# Altium PCB IK-1.PCBDOC (part 1 of 2)
Units mil, origin at the board's own origin, x right, y up, seen from the top; angles counter-clockwise.
Board outline 1760 x 825 mil, 4 copper layers (Top, GND Plane, Mid1-Ver, Bottom), stack 61.6 mil thick; 31 components, 39 nets, 162 pads, 193 vias.
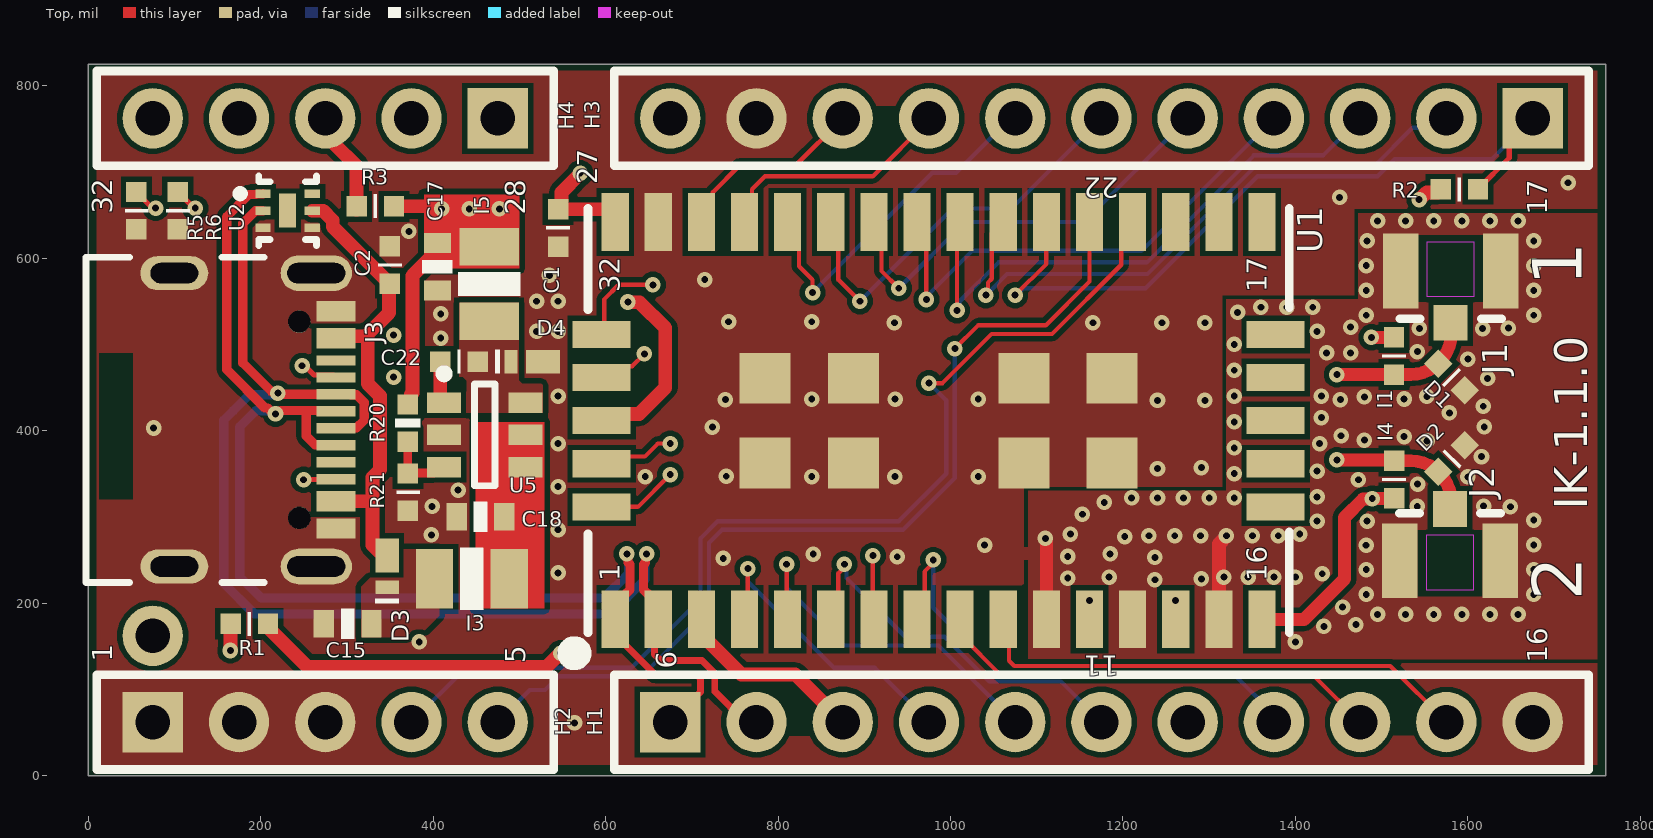
[diagram p0: Top view]
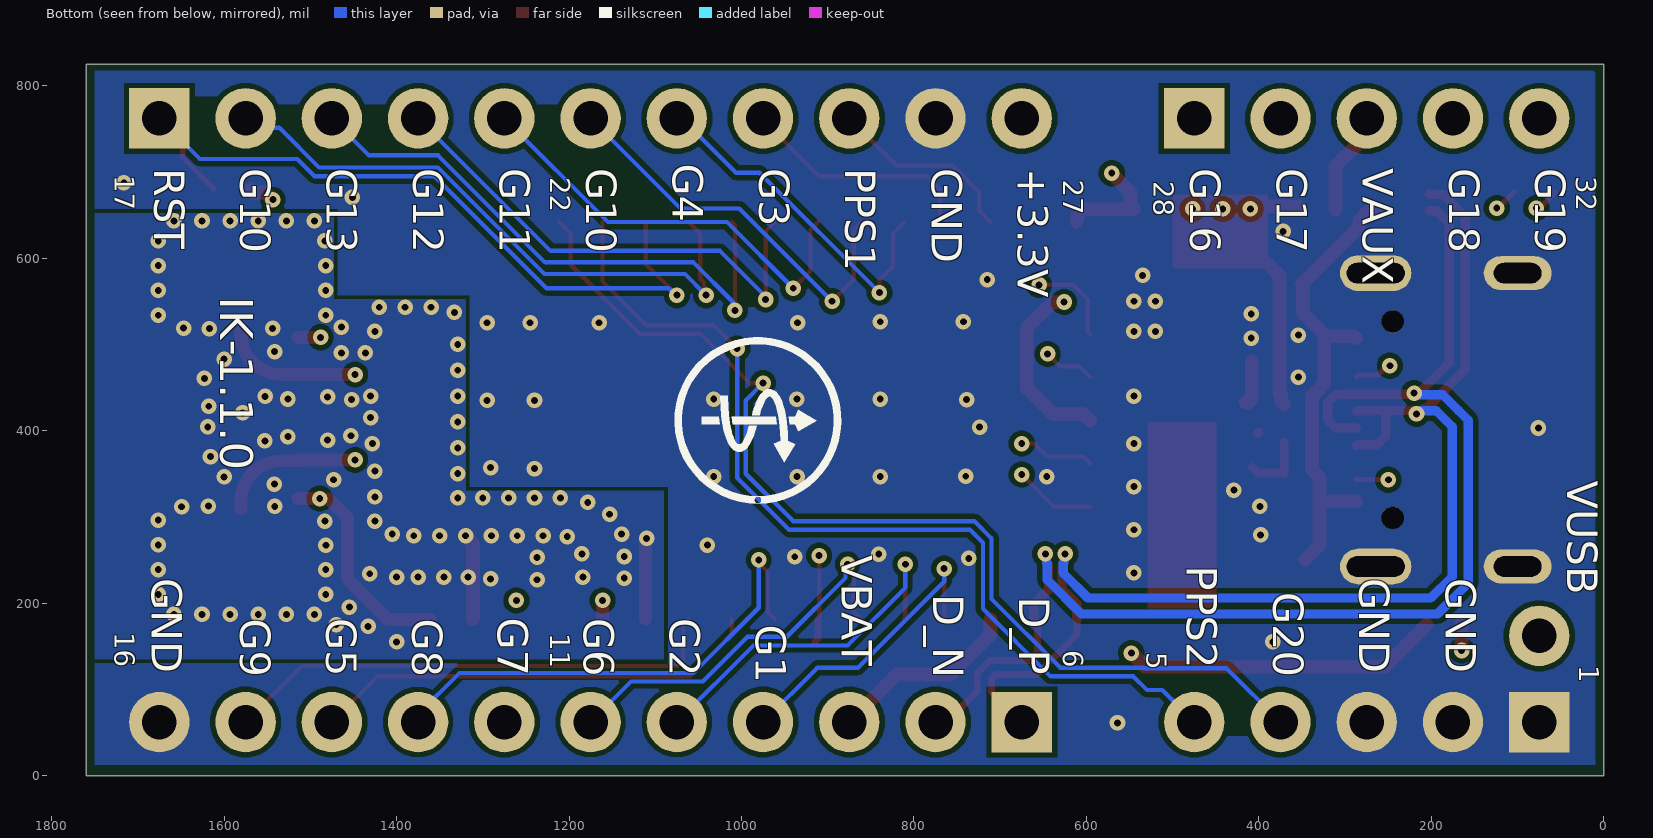
[diagram p1: Bottom view, seen from below]
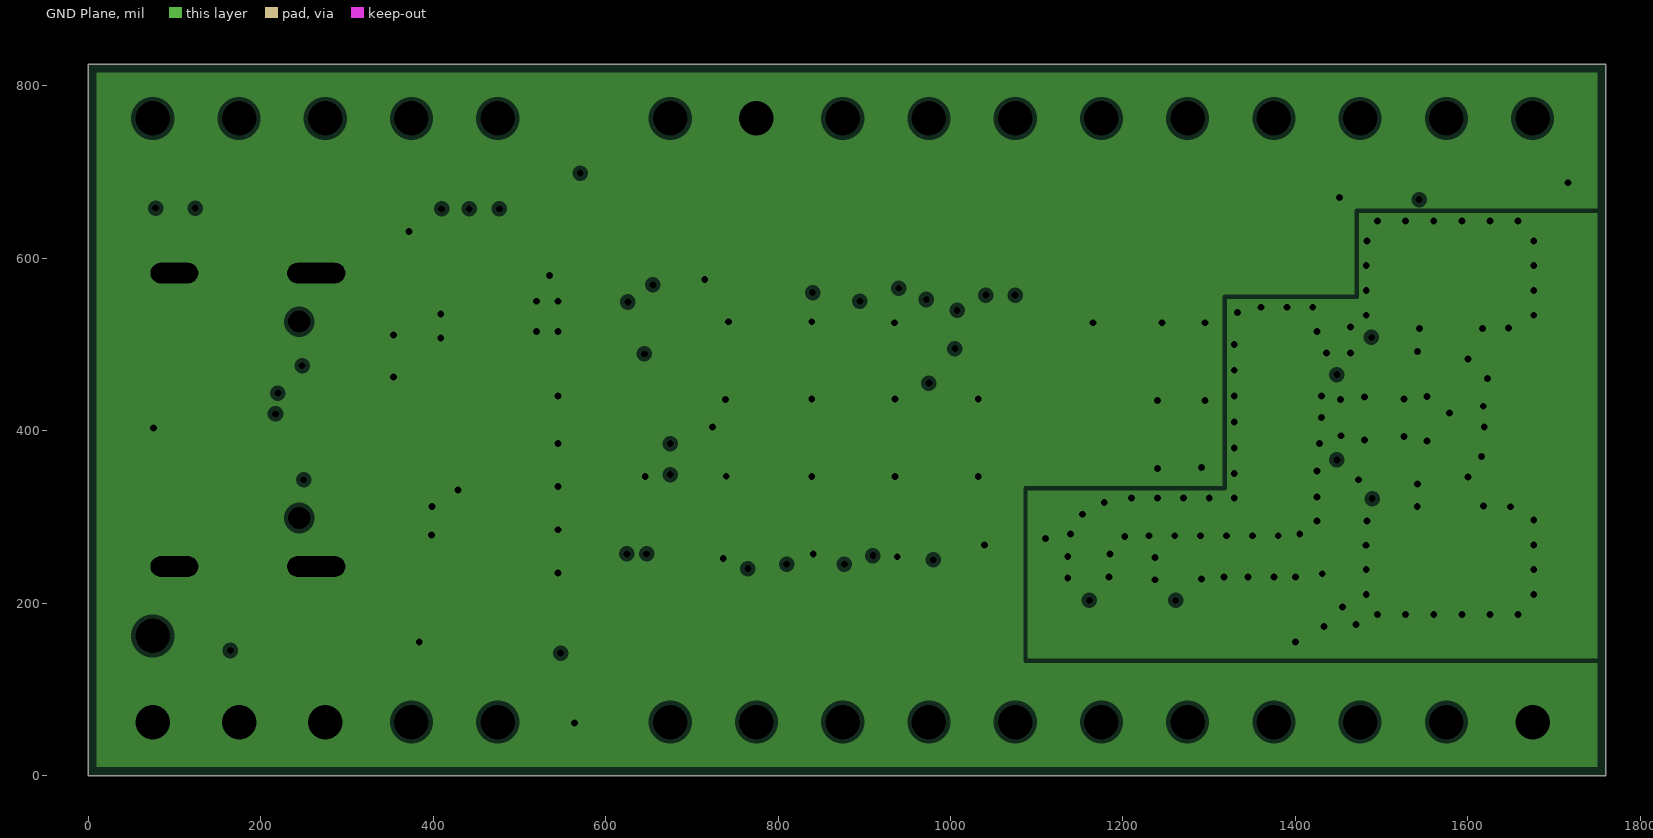
[diagram p2: GND Plane, clearances drawn from the general rule]
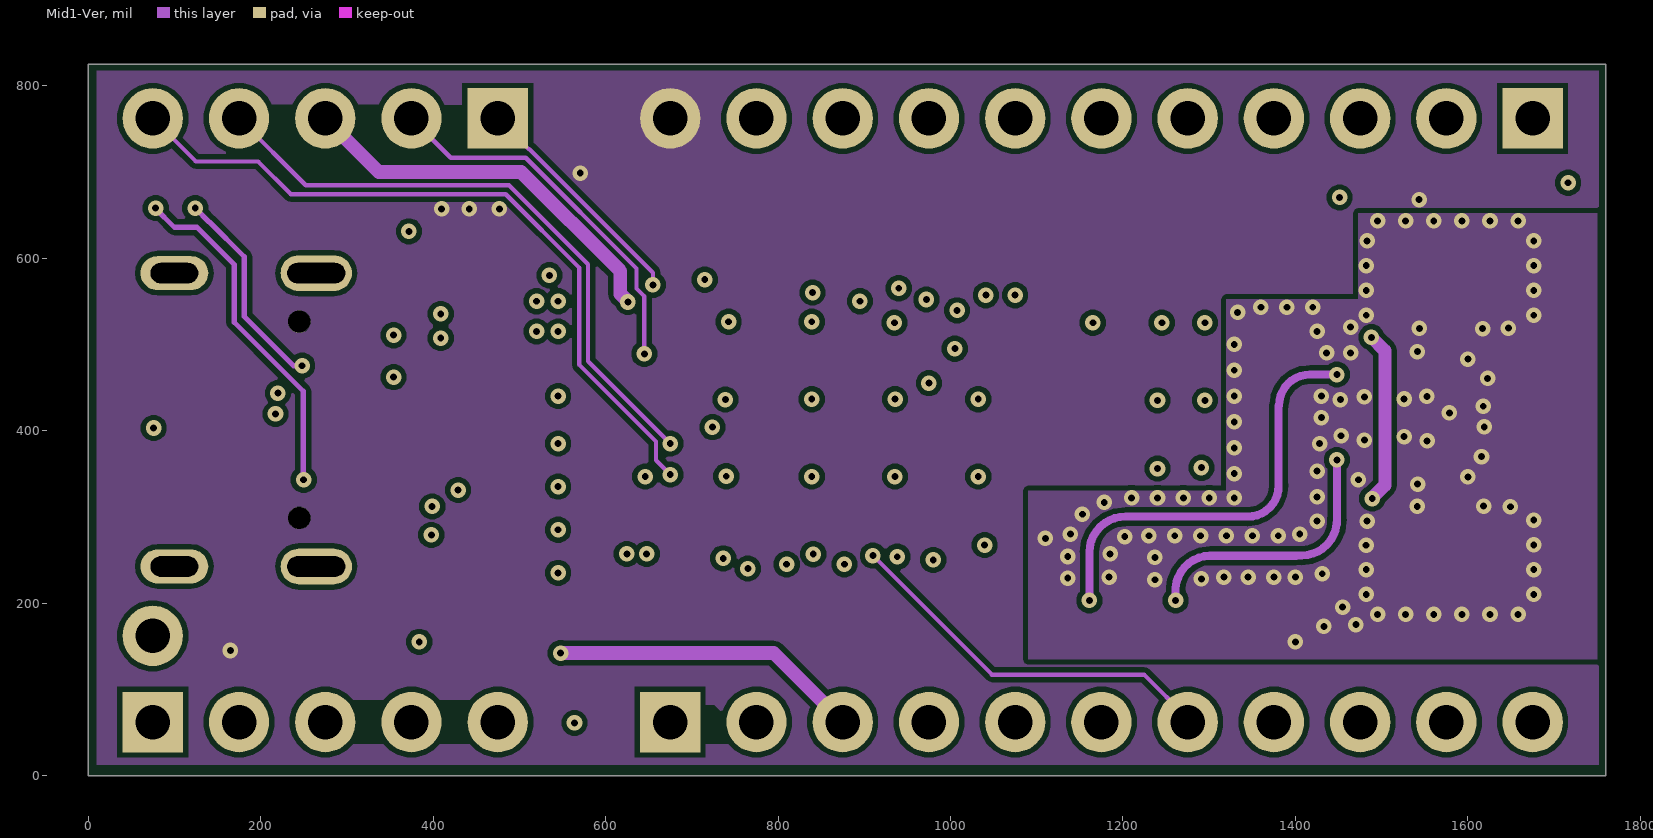
[diagram p3: Mid1-Ver]
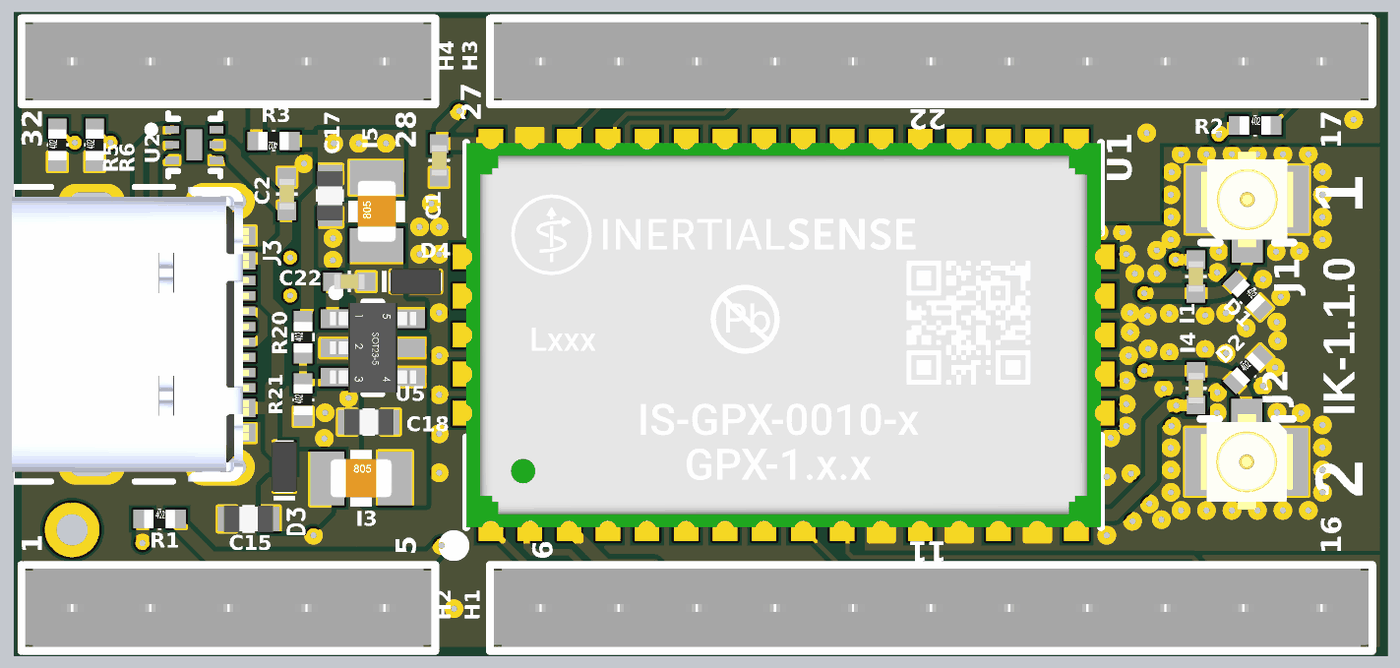
[diagram p4: 3D render of the assembled board from above, using the file's embedded part models]

## Layer stack, top to bottom
Solder Mask Top: solder mask 0.4, Solder Resist, Dk 3.5
Top: signal copper 2.1
Dielectric1: prepreg 8, PP-006, Dk 4.1
GND Plane: plane copper 0.7, net GND
Dielectric3: core 40, Core-009, Dk 4.5
Mid1-Ver: signal copper 0.7
Dielectric2: prepreg 8, PP-006, Dk 4.1
Bottom: signal copper 2.1
Solder Mask Bottom: solder mask 0.4, Solder Resist, Dk 3.5

## Board outline
1760,0 0,0 0,825 1760,825

## Design rules (kind name [scope] priority, off if disabled: settings)
AssemblyTestPointUsage [All] p1 off:
AssemblyTestpoint [All] p1 off: testpointundercomponent=TRUE minsize=40 maxsize=100 preferedsize=60 minholesize=0 maxholesize=40 preferedholesize=32 testpointgrid=1 usegrid=TRUE gridtolerance=0.01 allowsidetop=TRUE allowsidebottom=TRUE
BoardOutlineClearance BoardOutlineClearance_1 [OnLayer('Silkscreen Top')] p1: gap=0 ignorepadtopadclearanceinfootprint=FALSE
BoardOutlineClearance [All] p2 off: gap=9.84 ignorepadtopadclearanceinfootprint=FALSE
Clearance "Stitching GND" [IsStitchingVia and InNet('GND') vs (IsVia and (Not IsStitchingVia)) Or IsPad] p1: gap=1.97 ignorepadtopadclearanceinfootprint=FALSE
Clearance "Clearance - GPS Ant" [All vs InNet('GPS1_ANT')] p2: gap=8 ignorepadtopadclearanceinfootprint=FALSE except(0: Arc-Hole Track-Hole SMDPad-Hole THPad-Hole Via-Hole Fill-Hole Poly-Hole Region-Hole Text-Hole)
Clearance [All] p3: gap=5 ignorepadtopadclearanceinfootprint=FALSE except(0: Arc-Hole Track-Hole SMDPad-Hole THPad-Hole Via-Hole Fill-Hole Poly-Hole Region-Hole Text-Hole; 5.91: Arc-Fill Arc-Poly Arc-Region Track-Fill Track-Poly Track-Region SMDPad-Fill SMDPad-Poly SMDPad-Region THPad-Fill THPad-Poly THPad-Region Via-Fill Via-Poly Via-Region Fill-Fill Fill-Poly Fill-Region Poly-Poly Poly-Region Region-Region)
ComponentClearance Ignore [InComponent('H7')] p1: gap=-500 collisioncheckmode=3 verticalgap=-500 showdistances=FALSE
ComponentClearance HeaderClearance [InComponent('H1')] p2: gap=10 collisioncheckmode=3 verticalgap=-10 showdistances=FALSE
ComponentClearance Default [All] p3: gap=10 collisioncheckmode=3 verticalgap=10 showdistances=FALSE
DiffPairsRouting USB [InDifferentialPairClass('USB')] p1: maxlimit=5 minlimit=5 mostfreqgap=5 toplayer_minwidth=10.7 toplayer_maxwidth=10.8 toplayer_prefwidth=10.73 midlayer1_minwidth=6.9 midlayer1_maxwidth=7 midlayer1_prefwidth=6.97 bottomlayer_minwidth=10.7 bottomlayer_maxwidth=10.8 bottomlayer_prefwidth=10.73 impedanceprofiledriven=TRUE impedanceprofileid={BBA8E3E2-537E-421E-AE39-E3884618F825} impedanceprofilevalue=90.000000 maxuncoupledlength=500
DiffPairsRouting [All] p2: maxlimit=8 minlimit=8 mostfreqgap=8 toplayer_minwidth=8 toplayer_maxwidth=15 toplayer_prefwidth=15 midlayer1_minwidth=8 midlayer1_maxwidth=15 midlayer1_prefwidth=15 bottomlayer_minwidth=8 bottomlayer_maxwidth=15 bottomlayer_prefwidth=15 maxuncoupledlength=500
FabricationTestPointUsage [All] p1 off: valid=0 allowmultiple=FALSE
FabricationTestpoint [All] p1 off: side=3 testpointundercomponent=TRUE minsize=40 maxsize=100 preferedsize=60 minholesize=0 maxholesize=40 preferedholesize=32 testpointgrid=1 allowsidetop=TRUE allowsidebottom=TRUE usegrid=TRUE gridtolerance=0.01
HoleSize [All] p1: absolutevalues=TRUE maxlimit=200 minlimit=8 maxpercent=80.000 minpercent=20.000
HoleToHoleClearance [All] p1: gap=9 allowstackedmicrovias=TRUE
MinimumAnnularRing [All] p1: minimumring=4.5
MinimumSolderMaskSliver [All] p1: minsoldermaskwidth=3
PlaneClearance [All] p1: clearance=5
PlaneConnect "Power Plane Connect Style" [All] p1: planeconnectstyle=Direct reliefexpansion=20 reliefentries=4 reliefconductorwidth=7 reliefairgap=10
PolygonConnect "No Thermal Polygon Connect" [All vs InNamedPolygon('+1.8_L-01_P-002') or InNamedPolygon('GND_L01_P044') or InPolygonClass('NO THERMALS')] p1: connectstyle=Direct reliefconductorwidth=10 reliefentries=4 polygonreliefangle="90 Angle" airgapwidth=10
PolygonConnect "Default Polygon Connect" [All] p2: thpad.connectstyle=Relief thpad.reliefconductorwidth=5.91 thpad.reliefentries=4 thpad.polygonreliefangle="90 Angle" thpad.airgapwidth=5.91 smdpad.connectstyle=Relief smdpad.reliefconductorwidth=5.91 smdpad.reliefentries=4 smdpad.polygonreliefangle="90 Angle" smdpad.airgapwidth=5.91 via.connectstyle=Direct via.reliefconductorwidth=10 via.reliefentries=4 via.polygonreliefangle="90 Angle" via.airgapwidth=10
RoutingCorners "Routing Corners Default" [All] p1: cornerstyle=45-Degree minsetback=100 maxsetback=100
RoutingLayers "Routing Layers Default" [All] p1: top layer_v5=TRUE mid layer 1_v5=TRUE bottom layer_v5=TRUE
RoutingPriority "Routing Priority Default" [All] p1: routingpriority=0
RoutingVias "Via Style Default" [All] p1: holewidth=8 width=18 viastyle="Through Hole" minholewidth=8 minwidth=18 maxholewidth=8 maxwidth=18
SilkToBoardRegionClearance [All] p1 off:
SilkToSilkClearance [Not ( ((ObjectKind = 'Text') And ((UseInvertedRectangle = 'True') OR (IsTextInverted = 'True'))) OR (ObjectKind = 'Fill') ) vs Not ( ((ObjectKind = 'Text') And ((UseInvertedRectangle = 'True') OR (IsTextInverted = 'True'))) OR (ObjectKind = 'Fill') )] p1: silktosilkclearance=0.98
SilkToSolderMaskClearance SilkscreenOverComponentPads [NOT(IsPad AND OnLayer('Multi-Layer'))] p1: minsilkscreentomaskgap=0 clearancetoexposedcopper=TRUE
SolderMaskExpansion SolderMaskExpansion_Via [IsVia] p1: expansion=-19.68 istentingtop=FALSE
SolderMaskExpansion "Solder Mask Expansion" [All] p2: expansion=3 istentingtop=FALSE
SupplyNets "Schematic Supply Nets_5" [InNet('VBUS_IMX')] p1: voltage=0.000
SupplyNets "Schematic Supply Nets_4" [InNet('VIN')] p2: voltage=0.000
SupplyNets "Schematic Supply Nets_3" [InNet('GND')] p3: voltage=0.000
SupplyNets "Schematic Supply Nets_2" [InNet('VBAT')] p4: voltage=0.000
SupplyNets "Schematic Supply Nets_1" [InNet('VAUX')] p5: voltage=0.000
SupplyNets "Schematic Supply Nets" [InNet('+3.3V')] p6: voltage=0.000
Width "RF GPS" [InNetClass('RF_GPS')] p1: maxlimit=14.96 minlimit=9.45 preferedwidth=14.88 toplayer_minwidth=14.88 midlayer1_maxwidth=9.45 midlayer1_prefwidth=9.45 bottomlayer_minwidth=14.88 minimp=50.000000 maximp=50.000000 favimp=50.000000
Width "Width Default" [All] p2: maxlimit=150 minlimit=3 preferedwidth=6
13 further rules are at their usual default settings.

## Classes and differential pairs
net class IMX_USB: USB.D_N USB.D_P
net class RF_GPS: GNSS1_ANT GNSS2_ANT
polygon class "NO THERMALS": +3.3V_L03_P016 GND_L01_P021 GND_L04_P019 RF_GND_L-01_P-001 RF_GND_L-03_P-001 SW_L01_P012 VIN_L01_P017
differential pair USB.D: +USB.D_P -USB.D_N

## Components (designator, comment, footprint, x,y, rotation, side; value= is the part's Value field where it differs from the comment)
C1 "Cap" 0402 545,635 r270 top value=0.1uF
C2 "Cap" 0402 350,592 r90 top value=100nF
C15 "Cap" 0603 301,176 r180 top value=2.2uF
C17 "Cap" 0603 405,590 r270 top value=22uF
C18 "Cap" 0603 455,300 r180 top value=2.2uF
C22 "Cap" 0402 430,480 r0 top value=0.1uF
D1 "Diode - Bidirectional Zener" R0402 1581.06,462 r315 top
D2 "Diode - Bidirectional Zener" R0402 1581.06,367.56 r45 top
D3 "Diode - Schottky" D0603B 346.66,242.95 r90 top
D4 "Diode - Schottky" D0603B 515,480 r0 top
H1 "Hdr - 11pin" HEADER-.1IN-1X11 675,62 r0 top locked
H2 "Hdr - 5pin" HEADER-.1IN-1X5 75,62 r0 top
H3 "Hdr - 11pin" HEADER-.1IN-1X11 1675,762 r180 top locked
H4 "Hdr - 5pin" HEADER-.1IN-1X5 475,762 r180 top locked
I1 "Inductor" 0402 1514.18,486.44 r270 top value=120nH
I3 "Inductor" 0806 445,228 r0 top value=2.2uH
I4 "Inductor" 0402 1514.37,343.3 r90 top value=120nH
I5 "Inductor" 0806 465,570 r90 top value=2.2uH
J1 "RF - GND x 2" "RF UMC SMD" 1580,585 r270 top
J2 "RF - GND x 2" "RF UMC SMD" 1579.17,249.06 r90 top
J3 "USB4105-GF-A" GCT_USB4105-GF-A 100,412.5 r270 top
R1 "Res" R0402 187,176 r0 top value=1K
R2 "Res" R0402 1590,680 r0 top value=10K
R3 "Res" R0402 333,660 r180 top value=0
R5 "Res" R0402 56,655 r90 top value=5.1K
R6 "Res" R0402 104,655 r90 top value=5.1K
R20 "Res" R0402 370.72,408.65 r90 top value=30.9K
R21 "Res" R0402 370.72,328.65 r90 top value=10K
U1 "IMX" IS-GPX-1.0 579.69,165.43 r90 top locked
U2 "TPD3E001" QFN50P160X160X60-6N 231.46,655 r0 top
U5 "ADP2301" MO-178-AB 460,395 r0 top

## Footprints (in the part's own frame and the unit in brackets; to place one, negate y for a bottom-side part, rotate by r counter-clockwise, add the part's x,y. Pads: shape width x height; smd on the part's side, far side on the other; paste and mask are expansions set on the pad)
0402 [mm]
  rect 0.6x0.6 smd: 1(-0.55,0) 2(0.55,0)
  silkscreen extent -0.05,-0.35 0.05,0.35, body extent -0.5,-0.25 0.5,0.25, height 0.51
0603 [mm]
  rect 0.6x0.8 smd: 1(-0.7,0) 2(0.7,0)
  silkscreen extent -0.2,-0.45 0.2,0.45, body extent -0.8,-0.43 0.8,0.43, height 0.87
0806 [mm]
  rect 1.1x1.75 smd: 1(-1.1,0) 2(1.1,0)
  silkscreen extent -0.35,-0.92 0.35,0.92, body extent -1,-0.62 1,0.63, height 0.78
D0603B [mm] "Molded Diode, 2-Leads, Body 1.60x0.80mm, IPC Medium Density"
  rect 1.005x0.69 smd: A(0.312,0)
  rect 0.385x0.69 smd: C(-0.625,0)
  silkscreen extent -1.1,-0.35 -0.95,0.35, body extent -0.86,-0.42 0.86,0.42, height 0.45
GCT_USB4105-GF-A [mm]
  rect 0.6x1.15 smd: A1_B12(-3.2,4.755) A4_B9(-2.4,4.755) B1_A12(3.2,4.755) B4_A9(2.4,4.755)
  rect 0.3x1.15 smd: A5(-1.25,4.755) A6(-0.25,4.755) A7(0.25,4.755) A8(1.25,4.755) B5(1.75,4.755) B6(0.75,4.755) B7(-0.75,4.755) B8(-1.75,4.755)
  oval 1.05x2.1 hole 0.6 slot 1.7 at 90 deg: S1(-4.32,4.18) S4(4.32,4.18)
  oval 1x2 hole 0.6 slot 1.4 at 90 deg: S2(-4.32,0) S3(4.32,0)
  round 0.65 hole 0.65 unplated: ""(-2.89,3.68) ""(2.89,3.68)
  silkscreen extent -4.79,-2.6 4.79,2.65, body extent -4.79,-2.6 4.79,5.11, height 3.31
HEADER-.1IN-1X5 [mil]
  rect 70x70 hole 40: 1(0,0)
  round 70 hole 40: 2(100,0) 3(200,0) 4(300,0) 5(400,0)
  silkscreen extent -65,-55 465,55, body extent -60,-50 460,50, height 440
HEADER-.1IN-1X11 [mil]
  rect 70x70 hole 40: 1(0,0)
  round 70 hole 40: 2(100,0) 3(200,0) 4(300,0) 5(400,0) 6(500,0) 7(600,0) 8(700,0) 9(800,0) 10(900,0) 11(1000,0)
  silkscreen extent -65,-55 1065,55, body extent -60,-50 1060,50, height 440
IS-GPX-1.0 [mm] "Inerial Sense GPX-1.0, 42pins 1.27mm pitch"
  rect 1.5x1.5 smd: 0(5,-5.215) 0(5,-15.435) 0(5,-12.835) 0(5,-7.815) 0(7.5,-7.815) 0(7.5,-5.215) 0(7.5,-15.435) 0(7.5,-12.835)
  rect 1.7x0.8 smd paste-2.54: 1(0.4,-0.8) 2(0.4,-2.07) 3(0.4,-3.34) 4(0.4,-4.61) 5(0.4,-5.88) 6(0.4,-7.15) 7(0.4,-8.42) 8(0.4,-9.69) 9(0.4,-10.96) 10(0.4,-12.23) 11(0.4,-13.5) 12(0.4,-14.77) 13(0.4,-16.04) 14(0.4,-17.31) 15(0.4,-18.58) 16(0.4,-19.85) 17(12.1,-19.85) 18(12.1,-18.58) 19(12.1,-17.31) 20(12.1,-16.04) 21(12.1,-14.77) 22(12.1,-13.5) 23(12.1,-12.23) 24(12.1,-10.96) 25(12.1,-9.69) 26(12.1,-8.42) 27(12.1,-7.15) 28(12.1,-5.88) 29(12.1,-4.61) 30(12.1,-3.34) 31(12.1,-2.07) 32(12.1,-0.8)
  rect 0.8x1.7 smd paste-2.54: 33(3.71,-20.25) 34(4.98,-20.25) 35(6.25,-20.25) 36(7.52,-20.25) 37(8.79,-20.25) 38(8.79,-0.4) 39(7.52,-0.4) 40(6.25,-0.4) 41(4.98,-0.4) 42(3.71,-0.4)
  silkscreen extent -0.85,-20.65 12.5,0.65, body extent 0,-20.65 12.5,0, height 2.88
MO-178-AB [mm] "SOT23, 6-Leads, Body 3.0x2.8mm (max), Pitch 0.95mm, IPC Medium Density"
  rect 1x0.6 smd: 1(-1.2,0.95) 2(-1.2,0) 3(-1.2,-0.95) 4(1.2,-0.95) 5(1.2,0) 6(1.2,0.95)
  silkscreen extent -1.32,-1.5 0.3,1.92, body extent -1.4,-1.45 1.41,1.45, height 1.12
QFN50P160X160X60-6N [mm] "QFN, 6-Leads, Body 1.6x1.6mm (max), Pitch 0.50mm, IPC Medium Density"
  rect 0.45x0.25 smd: 1(-0.725,0.5) 2(-0.725,0) 3(-0.725,-0.5) 4(0.725,-0.5) 5(0.725,0) 6(0.725,0.5)
  rect 0.5x1 smd: 7(0,0)
  silkscreen extent -1.5,-1.02 0.85,1.02, body extent -0.82,-0.82 0.82,0.82, height 0.6
R0402 [mm]
  rect 0.6x0.6 smd: 1(-0.55,0) 2(0.55,0)
  silkscreen extent -0.05,-0.36 0.05,0.34, body extent -0.5,-0.3 0.5,0.3, height 0.2
"RF UMC SMD" [mm] "Ultra Miniature Coaxial Surface Mount"
  rect 1.05x1 smd: 1(1.525,0)
  rect 2.2x1.05 smd: 2(0,-1.475) 3(0,1.475)
  Top pour cut-out: -1.05,0.95 -1.05,-0.95 0.9,-0.95 0.9,0.95
  Top keep-out region: -0.85,0.7 -0.85,-0.7 0.75,-0.7 0.75,0.7
  silkscreen extent 1.4,-1.5 1.4,1.5, body extent -1.55,-1.5 1.55,1.5, height 1.3

## Part data
C1 C2: "CAP CER .10UF 50V X7R 10% 0402", Capacitance=0.1µF, Manufacturer="TDK Corporation", Manufacturer Part Number=C1005X7R1H104K, Operating Temperature="-55°C ~ 125°C", Package / Case="0402 (1005 Metric)", Ratings=-, Supplier Part Number 1=445-5932-1-ND, Temperature Coefficient=X7R, Tolerance=±10%, Voltage - Rated=50V, Applications="General Purpose", Category=Capacitors, ComponentLink1Description=http://www.tdk.co.jp/tefe02/e412_c.pdf, ComponentLink1URL=http://www.tdk.co.jp/tefe02/e412_c.pdf, Features=-, Height=-, LatestRevisionDate=17-Jul-2002, LatestRevisionNote="Re-released for DXP Platform.", Lead Spacing=-, Lead Style=-, Mounting Type="Surface Mount, MLCC", Packaging="Cut Tape (CT)", Pricing 1="1=0.3, 10=0.2, 100=0.08, 250=0.05752, 500=0.041, 1000=0.03 (USD)", Published=8-Jun-2000, Publisher="Altium Limited", RoHS="RoHS Compliant", Size / Dimension="0.039\" L x 0.020\" W (1.00mm x 0.50mm)", Stock 1=174080, Supplier 1=Digi-Key, Thickness="0.022\" (0.55mm)"
C15 C18: "CAP CER 2.2UF 25V X6S 0603", Capacitance=2.2uF, Case Code (Imperial)=0603, Case Code (Metric)=1608, Dielectric=X6S, Manufacturer=Murata, Manufacturer Part Number=GRT188C81E225KE13D, Max Operating Temperature=105°C, Min Operating Temperature=-55°C, Supplier Part Number 1=490-12293-6-ND, Tolerance=10%, Voltage Rating=25V, Case/Package=0603, Category=Capacitors, ComponentLink1Description=http://www.farnell.com/datasheets/2165949.pdf, ComponentLink1URL=http://www.farnell.com/datasheets/2165949.pdf, ComponentLink2Description=http://search.murata.co.jp/Ceramy/image/img/A01X/G101/ENG/GRT188C81E225KE13-01.pdf, ComponentLink2URL=http://search.murata.co.jp/Ceramy/image/img/A01X/G101/ENG/GRT188C81E225KE13-01.pdf, LatestRevisionDate=17-Jul-2002, LatestRevisionNote="Re-released for DXP Platform.", Length=0.063inch, Mount="Surface Mount", Packaging="Tape and Reel", Pricing 1="1=0.35, 10=0.239, 100=0.1355, 500=0.09564, 1000=0.08369 (USD)", Published=8-Jun-2000, Publisher="Altium Limited", Stock 1=16854, Supplier 1=Digi-Key, Thickness=0.035inch, Voltage Rating (DC)=25V, Width=0.031inch
C17: "CAP CER 22UF 6.3V X6S 0603", Capacitance=22uF, Case Code (Imperial)=0603, Case Code (Metric)=1608, Dielectric=X6S, Manufacturer=Murata, Manufacturer Part Number=GRM188C80J226ME15D, Max Operating Temperature=105°C, Min Operating Temperature=-55°C, Package Quantity=4000, Supplier Part Number 1=490-10471-6-ND, Tolerance=20%, Voltage Rating=6.3V, Case/Package=0603, Category=Capacitors, ComponentLink1Description=http://www.mouser.com/ds/2/281/c02e-2905.pdf, ComponentLink1URL=http://www.mouser.com/ds/2/281/c02e-2905.pdf, ComponentLink2Description=http://search.murata.co.jp/Ceramy/image/img/A01X/partnumbering_e_01.pdf, ComponentLink2URL=http://search.murata.co.jp/Ceramy/image/img/A01X/partnumbering_e_01.pdf, Height=0.8mm, LatestRevisionDate=17-Jul-2002, LatestRevisionNote="Re-released for DXP Platform.", Lead Free="Lead Free", Length=0.063inch, Mount="Surface Mount", Packaging="Tape and Reel", Pricing 1="1=0.25, 10=0.168, 100=0.0955, 500=0.0674, 1000=0.05897 (USD)", Published=8-Jun-2000, Publisher="Altium Limited", Stock 1=0, Supplier 1=Digi-Key, Termination=SMD/SMT, Thickness=0.039inch, Voltage Rating (DC)=6.3V, Weight=0.000222oz, Width=0.8mm
C22: "CAP CER 0.1UF 50V X7R 0402", Capacitance=0.1uF, Case Code (Imperial)=0402, Case Code (Metric)=1005, Dielectric=X7R, Manufacturer=TDK, Manufacturer Part Number=CGA2B3X7R1H104K050BB, Max Operating Temperature=125°C, Min Operating Temperature=-55°C, Package Quantity=1, Ratings=AEC-Q200, Supplier Part Number 1=445-6899-1-ND, Tolerance=10%, Voltage=50V, Case/Package=0402, Category=Capacitors, ComponentLink1Description=https://datasheet.ciiva.com/16498/mlccspec-automotive-general-midvoltage-en-16498528.pdf?src-supplier=Future+Electronics, ComponentLink1URL=https://datasheet.ciiva.com/16498/mlccspec-automotive-general-midvoltage-en-16498528.pdf?src-supplier=Future+Electronics, ComponentLink2Description=https://datasheet.ciiva.com/24216/cga2b3x7r1h104k050bb-266281-24216070.pdf?src-supplier=Mouser, ComponentLink2URL=https://datasheet.ciiva.com/24216/cga2b3x7r1h104k050bb-266281-24216070.pdf?src-supplier=Mouser, ComponentLink3Description=https://datasheet.ciiva.com/7975/1788388-7975306.pdf?src-supplier=Element14, ComponentLink3URL=https://datasheet.ciiva.com/7975/1788388-7975306.pdf?src-supplier=Element14, ComponentLink4Description=https://datasheet.ciiva.com/22703/1807242-22703013.pdf?src-supplier=Element14, ComponentLink4URL=https://datasheet.ciiva.com/22703/1807242-22703013.pdf?src-supplier=Element14, ComponentLink5Description=https://datasheet.ciiva.com/22725/1735392-22725627.pdf?src-supplier=Element14, ComponentLink5URL=https://datasheet.ciiva.com/22725/1735392-22725627.pdf?src-supplier=Element14, Composition=Ceramic, Depth=0.5mm, Height=0.5mm, LatestRevisionDate=17-Jul-2002, LatestRevisionNote="Re-released for DXP Platform.", Lead Free="Lead Free", Length=1mm, Mount="Surface Mount", Packaging="Tape and Reel", Pricing 1="1=0.16000, 10=0.11700, 100=0.05500, 500=0.03858, 1000=0.03194, 2500=0.02973, 5000=0.02720 (USD)", Published=8-Jun-2000, Publisher="Altium Limited", REACH SVHC="No SVHC", RoHS=Yes, Stock 1=12402793, Supplier 1=Digi-Key, Termination=SMD/SMT, Thickness=0.022inch, Voltage Rating=50V, Voltage Rating (DC)=50V, Weight=2.3E-05oz, Width=0.02inch
D1 D2: "LITTELFUSE - PESD0402-140 - DIODE, ESD PROTECTION, 0402, FULL REEL", Case/Package=0402, Clamping Voltage=40V, Manufacturer=Littelfuse, Manufacturer Part Number=PESD0402-140, Max Operating Temperature=125°C, Min Operating Temperature=-55°C, Operating Supply Voltage=14V, Power Line Protection=No, Resistor Type=Zener, Supplier Part Number 1=PESD0402-140CT-ND, Category="TVS Diodes", ComponentLink1Description=https://datasheet.ciiva.com/58684/-58684341.pdf?src-supplier=Digi-Key, ComponentLink1URL=https://datasheet.ciiva.com/58684/-58684341.pdf?src-supplier=Digi-Key, Direction=Bidirectional, Lead Free="Lead Free", Mount="Surface Mount", Number of Bidirectional Channels=1, Number of Pins=2, Packaging="Tape and Reel", Pricing 1="1=0.40000, 10=0.32100, 100=0.22900, 500=0.17400, 1000=0.13737, 2000=0.13279, 5000=0.12821 (USD)", REACH SVHC=Unknown, Reverse Standoff Voltage=14V, RoHS=No, Stock 1=211482, Supplier 1=Digi-Key, Turn-On Delay Time=1ns, Working Voltage=14V
D3 D4: "DIODE SCHOTTKY 30V 2A 0603", Manufacturer=Vishay, Manufacturer Part Number=VSKY20301608-G4-08, Supplier Part Number 1=VSKY20301608-G4-08GICT-ND, ComponentLink1Description=http://www.mouser.com/ds/2/427/vsky20301608-777242.pdf, ComponentLink1URL=http://www.mouser.com/ds/2/427/vsky20301608-777242.pdf, Pricing 1="1=0.38, 10=0.305, 25=0.2792, 100=0.2076, 250=0.1882, 500=0.15574, 1000=0.1168, 2500=0.10707 (USD)", Stock 1=13064, Supplier 1=Digi-Key
H1 H3: "11 pin header"
H2 H4: "5 pin header"
I1 I4: "Inductor RF Chip Wirewound 120nH 5% 100MHz 20Q-Factor 110mA 2.66Ohm DCR 0402 Paper T/R", Case Code (Imperial)=0402, Case Code (Metric)=1005, Current Rating=110mA, DC Resistance (DCR)=2.66R, Inductance=120nH, Inductance Tolerance=5%, Manufacturer=Murata, Manufacturer Part Number=LQW15ANR12J00D, Max Operating Temperature=125°C, Min Operating Temperature=-55°C, Package Quantity=10000, Self Resonant Frequency=1GHz, Supplier Part Number 1=490-4091-1-ND, Test Frequency=100MHz, Case/Package=0402, Category="Fixed Inductors", ComponentLink1Description=http://search.murata.co.jp/Ceramy/image/img/PDF/ENG/L0075S0083LQG15HS.pdf, ComponentLink1URL=http://search.murata.co.jp/Ceramy/image/img/PDF/ENG/L0075S0083LQG15HS.pdf, ComponentLink2Description=https://datasheet.ciiva.com/11799/0900766b8090d800-11799096.pdf?src-supplier=RSComponents, ComponentLink2URL=https://datasheet.ciiva.com/11799/0900766b8090d800-11799096.pdf?src-supplier=RSComponents, ComponentLink3Description=https://datasheet.ciiva.com/1042/l0075s0080lqw15a-00-1042180.pdf?src-supplier=Digi-Key, ComponentLink3URL=https://datasheet.ciiva.com/1042/l0075s0080lqw15a-00-1042180.pdf?src-supplier=Digi-Key, ComponentLink4Description=https://datasheet.ciiva.com/1042/l0075s0080lqw15a-00-1042181.pdf?src-supplier=Digi-Key, ComponentLink4URL=https://datasheet.ciiva.com/1042/l0075s0080lqw15a-00-1042181.pdf?src-supplier=Digi-Key, ComponentLink5Description=https://datasheet.ciiva.com/1042/l0075s0080lqw15a-00-1042182.pdf?src-supplier=Digi-Key, ComponentLink5URL=https://datasheet.ciiva.com/1042/l0075s0080lqw15a-00-1042182.pdf?src-supplier=Digi-Key, ComponentLink6Description=https://datasheet.ciiva.com/16207/l0075s0080lqw15a-00-16207819.pdf?src-supplier=Future+Electronics, ComponentLink6URL=https://datasheet.ciiva.com/16207/l0075s0080lqw15a-00-16207819.pdf?src-supplier=Future+Electronics, ComponentLink7Description=https://datasheet.ciiva.com/8506/l0075s0080lqw15a-00-8506030.pdf?src-supplier=Avnet, ComponentLink7URL=https://datasheet.ciiva.com/8506/l0075s0080lqw15a-00-8506030.pdf?src-supplier=Avnet, Core Material=Air,Ferrite, DC Current=110mA, Depth=0.6mm, Height=0.5mm, Lead Free="Lead Free", Length=1mm, Max DC Current=110mA, Military Standard=Not, Mount="Surface Mount", Number of Pins=2, Packaging="Tape and Reel", Pricing 1="1=0.15000, 10=0.13500, 25=0.12000, 50=0.10200, 100=0.09000, 250=0.08252, 500=0.07500, 1000=0.06300, 2500=0.05400 (USD)", Radiation Hardening=No, REACH SVHC="No SVHC", RoHS=Yes, Shielding=Unshielded, Stock 1=2053, Supplier 1=Digi-Key, Termination=SMD/SMT, Tolerance=5%, Weight=2.8E-05oz, Width=0.02inch
I3 I5: "FIXED IND 2.2UH 1.2A 110 MOHM", Case Code (Imperial)=0806, Case Code (Metric)=2016, Current Rating=1.2A, DC Resistance (DCR)=137.5mR, Inductance=2.2uh, Manufacturer=TDK, Manufacturer Part Number=MLP2016H2R2MT0S1, Max Operating Temperature=125°C, Min Operating Temperature=-40°C, Package Quantity=3000, Supplier Part Number 1=445-15724-6-ND, Test Frequency=2MHz, Tolerance=20%, Case/Package=0806, ComponentLink1Description=https://datasheet.ciiva.com/29697/inductor-commercial-power-mlp-en-29697725.pdf, ComponentLink1URL=https://datasheet.ciiva.com/29697/inductor-commercial-power-mlp-en-29697725.pdf, ComponentLink2Description=https://datasheet.ciiva.com/29697/inductor-commercial-power-mlp-en-29697726.pdf, ComponentLink2URL=https://datasheet.ciiva.com/29697/inductor-commercial-power-mlp-en-29697726.pdf, Core Material=Ferrite, Height - Seated (Max)=0.039inch, Lead Free="Lead Free", Length=0.079inch, Mount="Surface Mount", Packaging="Tape and Reel", Pricing 1="1=0.38, 10=0.335, 100=0.2302, 500=0.19674, 1000=0.1507 (USD)", Shielding=Unshielded, Stock 1=14048, Supplier 1=Digi-Key, Width=0.063inch
J1 J2: "CONN UMC RCPT STR 50 OHM SMD", Dielectric Material=-, Frequency - Max=6GHz, Housing Color=Gold, Manufacturer="Emerson Network Power Connectivity Johnson", Manufacturer Part Number=128-0711-201, Operating Temperature="-40°C ~ 90°C", Supplier Part Number 1=J983CT-ND, Voltage Rating=200V, Body Finish=Gold, Body Material=-, Cable Group=-, Category="Connectors, Interconnects", Center Contact Material=-, Center Contact Plating=Gold, ComponentLink1Description=http://media.digikey.com/pdf/Data%20Sheets/Emerson%20PDFs/UMC%20Product%20Catalog.pdf, ComponentLink1URL=http://media.digikey.com/pdf/Data%20Sheets/Emerson%20PDFs/UMC%20Product%20Catalog.pdf, Connector Style="Ultra Miniature Coaxial", Connector Type="Receptacle, Male Pins", Contact Termination=Solder, Fastening Type=Snap-On, Features=-, Impedance="50 Ohm", Ingress Protection=-, Mounting Type="Surface Mount", Packaging="Cut Tape (CT)", Pricing 1="1=0.93, 10=0.832, 50=0.784, 100=0.672, 250=0.576, 500=0.544, 750=0.48, 1000=0.448 (USD)", RoHS="RoHS Compliant", Shield Termination=Solder, Stock 1=1514, Supplier 1=Digi-Key
J3: "USB-C (USB TYPE-C) USB 2.0 Receptacle Connector 24 (16+8 Dummy) Position Surface Mount, Right Angle; Through Hole", Manufacturer=GCT, Package=None, Supplier Part Number 1=2073-USB4105-GF-ACT-ND, Availability=Unavailable, Manufacturer Part Number=USB4105-GF-A, Price=None, Supplier 1=DigiKey
R1: "1 kOhms 1/16W Chip Resistor 0402 (1005 Metric) Moisture Resistant Thick Film", Case Code (Imperial)=0402, Case Code (Metric)=1005, Manufacturer=Yageo, Manufacturer Part Number=RC0402FR-071KL, Max Operating Temperature=155°C, Max Power Dissipation=63mW, Min Operating Temperature=-55°C, Power Rating=62.5mW, Resistance Tolerance=1%, Resistor Type="Thick Film", Supplier Part Number=311-1.00KLRTR-ND, Temperature Coefficient=100ppm/°C, Voltage Rating=50V, Case/Package=0402, Category="Chip SMD Resistors", ComponentLink1Description=https://datasheet.ciiva.com/11819/0900766b80c66297-11819477.pdf?src-supplier=Rs, ComponentLink1URL=https://datasheet.ciiva.com/11819/0900766b80c66297-11819477.pdf?src-supplier=Rs, ComponentLink2Description=https://datasheet.ciiva.com/7983/1018594-7983502.pdf?src-supplier=Element14, ComponentLink2URL=https://datasheet.ciiva.com/7983/1018594-7983502.pdf?src-supplier=Element14, ComponentLink3Description=https://datasheet.ciiva.com/22747/1018594-22747513.pdf?src-supplier=Element14, ComponentLink3URL=https://datasheet.ciiva.com/22747/1018594-22747513.pdf?src-supplier=Element14, ComponentLink4Description=https://datasheet.ciiva.com/12666/pyu-rc0402-51-rohs-l-6-r-12666741.pdf?src-supplier=Mouser, ComponentLink4URL=https://datasheet.ciiva.com/12666/pyu-rc0402-51-rohs-l-6-r-12666741.pdf?src-supplier=Mouser, ComponentLink5Description=https://datasheet.ciiva.com/7849/1018594-7849869.pdf?src-supplier=Element14, ComponentLink5URL=https://datasheet.ciiva.com/7849/1018594-7849869.pdf?src-supplier=Element14, ComponentLink6Description=https://datasheet.ciiva.com/7849/1018594-7849871.pdf?src-supplier=Element14, ComponentLink6URL=https://datasheet.ciiva.com/7849/1018594-7849871.pdf?src-supplier=Element14, ComponentLink7Description=https://datasheet.ciiva.com/17063/pyu-rc0402-51-rohs-l-6-r-17063193.pdf?src-supplier=Future+Electronics, ComponentLink7URL=https://datasheet.ciiva.com/17063/pyu-rc0402-51-rohs-l-6-r-17063193.pdf?src-supplier=Future+Electronics, Construction=Rectangular, Depth=0.5mm, Features="Moisture Resistant", Height=0.32mm, Lead Free="Lead Free", Length=1mm, Military Standard=Not, Number of Terminations=2, Packaging="Tape and Reel", Pins=2, Pricing="10000=0.00261, 20000=0.00231, 30000=0.00216, 50000=0.00199, 100000=0.00179 (USD)", Reach SVHC Compliant=No, RoHS=Yes, RoHS Compliant=Yes, Series=RC, Stock=29757748, Supplier=Digi-Key, Technology="THICK FILM", Termination=SMD/SMT, Tolerance=1%, Voltage Rating (DC)=50V, Width=0.5mm
R2: "10 kOhms 1/16W Chip Resistor 0402 (1005 Metric) Moisture Resistant Thick Film", Case Code (Imperial)=0402, Case Code (Metric)=1005, Manufacturer="Stackpole Electronics", Manufacturer Part Number=RMCF0402FT10K0, Max Operating Temperature=155°C, Max Power Dissipation=63mW, Min Operating Temperature=-55°C, Power Rating=62.5mW, Resistance Tolerance=1%, Resistor Type="Thick Film", Supplier Part Number=RMCF0402FT10K0TR-ND, Temperature Coefficient=100ppm/°C, Voltage Rating=50V, Case/Package=0402, Category="Chip SMD Resistors", ComponentLink1Description=https://datasheet.ciiva.com/11819/0900766b80c66297-11819477.pdf?src-supplier=Rs, ComponentLink1URL=https://datasheet.ciiva.com/11819/0900766b80c66297-11819477.pdf?src-supplier=Rs, ComponentLink2Description=https://datasheet.ciiva.com/7983/1018594-7983502.pdf?src-supplier=Element14, ComponentLink2URL=https://datasheet.ciiva.com/7983/1018594-7983502.pdf?src-supplier=Element14, ComponentLink3Description=https://datasheet.ciiva.com/22747/1018594-22747513.pdf?src-supplier=Element14, ComponentLink3URL=https://datasheet.ciiva.com/22747/1018594-22747513.pdf?src-supplier=Element14, ComponentLink4Description=https://datasheet.ciiva.com/12666/pyu-rc0402-51-rohs-l-6-r-12666741.pdf?src-supplier=Mouser, ComponentLink4URL=https://datasheet.ciiva.com/12666/pyu-rc0402-51-rohs-l-6-r-12666741.pdf?src-supplier=Mouser, ComponentLink5Description=https://datasheet.ciiva.com/7849/1018594-7849869.pdf?src-supplier=Element14, ComponentLink5URL=https://datasheet.ciiva.com/7849/1018594-7849869.pdf?src-supplier=Element14, ComponentLink6Description=https://datasheet.ciiva.com/7849/1018594-7849871.pdf?src-supplier=Element14, ComponentLink6URL=https://datasheet.ciiva.com/7849/1018594-7849871.pdf?src-supplier=Element14, ComponentLink7Description=https://datasheet.ciiva.com/17063/pyu-rc0402-51-rohs-l-6-r-17063193.pdf?src-supplier=Future+Electronics, ComponentLink7URL=https://datasheet.ciiva.com/17063/pyu-rc0402-51-rohs-l-6-r-17063193.pdf?src-supplier=Future+Electronics, Construction=Rectangular, Depth=0.5mm, Features="Moisture Resistant", Height=0.32mm, Lead Free="Lead Free", Length=1mm, Military Standard=Not, Number of Terminations=2, Packaging="Tape and Reel", Pins=2, Pricing="10000=0.00261, 20000=0.00231, 30000=0.00216, 50000=0.00199, 100000=0.00179 (USD)", Reach SVHC Compliant=No, RoHS=Yes, RoHS Compliant=Yes, Series=RC, Stock=29757748, Supplier=Digi-Key, Technology="THICK FILM", Termination=SMD/SMT, Tolerance=1%, Voltage Rating (DC)=50V, Width=0.5mm
R3: "0 Ohms 1/16W Chip Resistor 0402 (1005 Metric) Moisture Resistant Thick Film", Case Code (Imperial)=0402, Case Code (Metric)=1005, Manufacturer=Yageo, Manufacturer Part Number=RC0402JR-070RL, Max Operating Temperature=155°C, Max Power Dissipation=63mW, Min Operating Temperature=-55°C, Power Rating=62.5mW, Resistance Tolerance=1%, Resistor Type="Thick Film", Supplier Part Number=311-0.0JRCT-ND, Temperature Coefficient=100ppm/°C, Voltage Rating=50V, Case/Package=0402, Category="Chip SMD Resistors", ComponentLink1Description=https://datasheet.ciiva.com/11819/0900766b80c66297-11819477.pdf?src-supplier=Rs, ComponentLink1URL=https://datasheet.ciiva.com/11819/0900766b80c66297-11819477.pdf?src-supplier=Rs, ComponentLink2Description=https://datasheet.ciiva.com/7983/1018594-7983502.pdf?src-supplier=Element14, ComponentLink2URL=https://datasheet.ciiva.com/7983/1018594-7983502.pdf?src-supplier=Element14, ComponentLink3Description=https://datasheet.ciiva.com/22747/1018594-22747513.pdf?src-supplier=Element14, ComponentLink3URL=https://datasheet.ciiva.com/22747/1018594-22747513.pdf?src-supplier=Element14, ComponentLink4Description=https://datasheet.ciiva.com/12666/pyu-rc0402-51-rohs-l-6-r-12666741.pdf?src-supplier=Mouser, ComponentLink4URL=https://datasheet.ciiva.com/12666/pyu-rc0402-51-rohs-l-6-r-12666741.pdf?src-supplier=Mouser, ComponentLink5Description=https://datasheet.ciiva.com/7849/1018594-7849869.pdf?src-supplier=Element14, ComponentLink5URL=https://datasheet.ciiva.com/7849/1018594-7849869.pdf?src-supplier=Element14, ComponentLink6Description=https://datasheet.ciiva.com/7849/1018594-7849871.pdf?src-supplier=Element14, ComponentLink6URL=https://datasheet.ciiva.com/7849/1018594-7849871.pdf?src-supplier=Element14, ComponentLink7Description=https://datasheet.ciiva.com/17063/pyu-rc0402-51-rohs-l-6-r-17063193.pdf?src-supplier=Future+Electronics, ComponentLink7URL=https://datasheet.ciiva.com/17063/pyu-rc0402-51-rohs-l-6-r-17063193.pdf?src-supplier=Future+Electronics, Construction=Rectangular, Depth=0.5mm, Features="Moisture Resistant", Height=0.32mm, Lead Free="Lead Free", Length=1mm, Military Standard=Not, Number of Terminations=2, Packaging="Tape and Reel", Pins=2, Pricing="10000=0.00261, 20000=0.00231, 30000=0.00216, 50000=0.00199, 100000=0.00179 (USD)", Reach SVHC Compliant=No, RoHS=Yes, RoHS Compliant=Yes, Series=RC, Stock=29757748, Supplier=Digi-Key, Technology="THICK FILM", Termination=SMD/SMT, Tolerance=1%, Voltage Rating (DC)=50V, Width=0.5mm
R5 R6: "Res Thick Film 1.0 x 0.5 mm 5.1K Ohm 1% 0.063W(1/16W) 100ppm/ C Molded SMD Paper T/R", Case Code (Imperial)=0402, Case Code (Metric)=1005, Manufacturer=Yageo, Manufacturer Part Number=RC0402FR-075K1L, Max Operating Temperature=155°C, Max Power Dissipation=63mW, Min Operating Temperature=-55°C, Package Quantity=1, Resistance Tolerance=1%, Resistor Type="Thick Film", Supplier Part Number 1=311-5.10KLRCT-ND, Temperature Coefficient=100ppm/°C, Voltage Rating=50V, Case/Package=0402, Category="Chip SMD Resistors", ComponentLink1Description=https://datasheet.ciiva.com/7983/1018594-7983519.pdf?src-supplier=Element14, ComponentLink1URL=https://datasheet.ciiva.com/7983/1018594-7983519.pdf?src-supplier=Element14, ComponentLink2Description=https://datasheet.ciiva.com/46394/1018594-46394936.pdf?src-supplier=Element14, ComponentLink2URL=https://datasheet.ciiva.com/46394/1018594-46394936.pdf?src-supplier=Element14, ComponentLink3Description=https://datasheet.ciiva.com/2453/pyu-r-int-thick-7-2453401.pdf?src-supplier=Digi-Key, ComponentLink3URL=https://datasheet.ciiva.com/2453/pyu-r-int-thick-7-2453401.pdf?src-supplier=Digi-Key, ComponentLink4Description=https://datasheet.ciiva.com/2453/pyu-r-int-thick-7-2453402.pdf?src-supplier=Digi-Key, ComponentLink4URL=https://datasheet.ciiva.com/2453/pyu-r-int-thick-7-2453402.pdf?src-supplier=Digi-Key, ComponentLink5Description=https://datasheet.ciiva.com/2453/pyu-r-int-thick-7-2453400.pdf?src-supplier=Digi-Key, ComponentLink5URL=https://datasheet.ciiva.com/2453/pyu-r-int-thick-7-2453400.pdf?src-supplier=Digi-Key, ComponentLink6Description=https://datasheet.ciiva.com/12558/pyu-rc0402-51-rohs-l-6-r-8721-12558460.pdf?src-supplier=Mouser, ComponentLink6URL=https://datasheet.ciiva.com/12558/pyu-rc0402-51-rohs-l-6-r-8721-12558460.pdf?src-supplier=Mouser, ComponentLink7Description=https://datasheet.ciiva.com/16744/pyu-rc0402-51-rohs-l-6-r-16744283.pdf?src-supplier=Future+Electronics, ComponentLink7URL=https://datasheet.ciiva.com/16744/pyu-rc0402-51-rohs-l-6-r-16744283.pdf?src-supplier=Future+Electronics, ComponentLink8Description=https://datasheet.ciiva.com/15189/getdatasheetpartid-323636-15189493.pdf?src-supplier=Verical, ComponentLink8URL=https://datasheet.ciiva.com/15189/getdatasheetpartid-323636-15189493.pdf?src-supplier=Verical, Construction=Rectangular, Depth=0.5mm, Features="Moisture Resistant", Height=0.016inch, Lead Free="Lead Free", Length=1mm, Military Standard=Not, Number of Terminations=2, Packaging="Tape and Reel", Power Rating=63mW, Pricing="1=0.10000, 10=0.01500, 100=0.00730, 1000=0.00417, 2500=0.00342, 5000=0.00297 (USD)", Reach SVHC Compliant=Unknown, RoHS=Yes, RoHS Compliant=Yes, Series=RC, Stock=1485978, Supplier 1=Digi-Key, Technology="THICK FILM", Termination=SMD/SMT, Tolerance=1%, Voltage Rating (DC)=50V, Width=0.02inch, Working Voltage=50V
R20: "RES TF 30.9K OHM 1% 1/16W 0402", Manufacturer="Stackpole Electronics Inc", Manufacturer Part Number=RMCF0402FT30K9, Package / Case="0402 (1005 Metric)", Power (Watts)="0.063W, 1/16W", Resistance (Ohms)=30.9K, Supplier Part Number 1=RMCF0402FT30K9CT-ND, Temperature Coefficient=±100ppm/°C, Tolerance=±1%, Category=Resistors, ComponentLink1Description=http://www.seielect.com/Catalog/SEI-RMCF.pdf, ComponentLink1URL=http://www.seielect.com/Catalog/SEI-RMCF.pdf, Composition="Thick Film", Features=-, Height="0.016\" (0.40mm)", LatestRevisionDate=2-Dec-2009, Number of Terminations=2, Packaging="Cut Tape (CT)", Pricing 1="1=0.04, 10=0.025, 50=0.0138, 100=0.0105, 250=0.0078, 500=0.00576, 1000=0.00384 (USD)", RoHS="RoHS Compliant", Size / Dimension="0.039\" L x 0.020\" W (1.00mm x 0.50mm)", Stock 1=6328, Supplier 1=Digi-Key
R21: "RES 10.0K OHM 1/16W 1% 0402 SMD", Manufacturer=Yageo, Manufacturer Part Number=RC0402FR-0710KL, Package / Case="0402 (1005 Metric)", Power (Watts)="0.063W, 1/16W", Resistance (Ohms)=10K, Supplier Part Number 1=311-10.0KLRCT-ND, Temperature Coefficient=±100ppm/°C, Tolerance=±1%, Category=Resistors, ComponentLink1Description=http://www.yageo.com/documents/recent/PYu-RC0402_51_RoHS_L_6.pdf, ComponentLink1URL=http://www.yageo.com/documents/recent/PYu-RC0402_51_RoHS_L_6.pdf, Composition="Thick Film", Features=-, Height="0.014\" (0.35mm)", LatestRevisionDate=2-Dec-2009, Number of Terminations=2, Packaging="Cut Tape (CT)", Pricing 1="10=0.014, 50=0.0104, 100=0.0079, 250=0.00584, 500=0.00432, 1000=0.00288 (USD)", RoHS="RoHS Compliant", Size / Dimension="0.039\" L x 0.020\" W (1.00mm x 0.50mm)", Stock 1=5597980, Supplier 1=Digi-Key
U1: library part IS-GPX-1.0, "Inertial Sense IMX", Manufacturer="Inertial Sense", Manufacturer Part Number=IS-IMX-6, Supplier 1="Inertial Sense", Supplier Part Number 1=IS-IMX-6
U2: "TVS DIODE 5.5V SOT5", Breakdown Voltage=11V, Capacitance=1.5pF, Case/Package=SOT, Clamping Voltage=105.5V, Leakage Current=1nA, Manufacturer="Texas Instruments", Manufacturer Part Number=TPD3E001DRLR, Max Operating Temperature=85°C, Max Supply Current=100nA, Max Supply Voltage=5.5V, Min Operating Temperature=-40°C, Min Supply Voltage=900mV, Package Quantity=1, Peak Pulse Power=90W, Power Line Protection=Yes, Supplier Part Number 1=296-21885-1-ND, Depth=1.2mm, Direction=Unidirectional, Height=0.55mm, Interface=USB, Lead Free="Lead Free", Length=1.6mm, Max Supply Voltage (DC)=5.5V, Min Breakdown Voltage=11V, Min Supply Voltage (DC)=900mV, Nominal Supply Current=1nA, Number of Bidirectional Channels=3, Number of Channels=3, Number of Pins=5, Packaging="Tape and Reel", Pricing 1="1=0.53, 10=0.454, 100=0.3392, 500=0.26648, 1000=0.20592 (USD)", Radiation Hardening=No, REACH SVHC="No SVHC", Reverse Standoff Voltage=5.5V, Stock 1=81393, Supplier 1=Digi-Key, Termination=SMD/SMT, Weight=9.9E-05oz, Width=1.2mm
U5: "IC BUCK ADJ 1.2A 6TSOT", Current - Output=1.2A, Frequency - Switching=1.4MHz, Manufacturer="Analog Devices Inc", Manufacturer Part Number=ADP2301AUJZ-R7, Operating Temperature="-40°C ~ 125°C", Package / Case="SOT-23-6 Thin, TSOT-23-6", Supplier Device Package=TSOT-6, Supplier Part Number 1=ADP2301AUJZ-R7CT-ND, Voltage - Input="3 V ~ 20 V", Voltage - Output="0.8 V ~ 17 V", Category="Integrated Circuits (ICs)", ComponentLink1Description=http://www.analog.com/static/imported-files/data_sheets/ADP2300_2301.pdf, ComponentLink1URL=http://www.analog.com/static/imported-files/data_sheets/ADP2300_2301.pdf, Mounting Type="Surface Mount", Number of Outputs=1, Output Type=Adjustable, Packaging="Cut Tape (CT)", Pricing 1="1=3.06, 25=2.4992, 100=2.244, 250=2.04, 500=1.785, 1000=1.53 (USD)", PWM Type="Current Mode", RoHS="RoHS Compliant", Stock 1=6699, Supplier 1=Digi-Key, Synchronous Rectifier=No, Type="Step-Down (Buck)"

## Free pads (board coordinates)
  round 70 hole 40: 1(75,162)

## Via types
v1: diameter 18, hole 8, Top to Bottom, 193 vias

## Nets (pads, with @x,y where several pads share a name; then routed paths per layer and width w, separated by ;. In a path a pad name is that pad's centre, name@x,y a point inside that pad or via, vN(x,y) a via of type N, cw(c..) or ccw(c..) an arc to the next point about the centre after c; other vN are vias at no path point)
+3.3V: C1.1 C17.1 H3.11 I5.2 R1.1 R2.1 R3.1 R20.2 U1.32 | length 446.1
  Top w16: v1(165,145) 165.17,145.17 165.17,175.83 R1.1 ; R3.1 407,660 v1(410,657) ; R20.2 374.53,434.11 374.53,441.76 376.25,443.49 376.25,579.64 397.25,600.64 397.25,613.75 C17.1@400.77,617.26 ; v1(570.64,698.44) 570.64,697.9 548.81,676.08 548.81,660.46 C1.1 603.43,656.65 611.18,648.91 U1.32 ; v1(1543.34,667.91) 1543.88,667.91 1552.15,676.19 1564.54,676.19 R2.1
  other v1: 442,657 477,657
FB: R20.1 R21.2 U5.3 | length 76.8
  Top w10: R20.1 R21.2 371.2,350.79 400.95,350.79 U5.3@407.76,357.6
G1/Rx2/RxCAN/SCL: H1.4 U1.4 | length 352.9
  Top w5: U1.4 765,185 v1(765,240)
  Bottom w5: v1(765,240) 765,225 865,125 912,125 H1.4
G2/Tx2TxCAN/SDA: H1.5 U1.5 | length 421
  Top w5: v1(810,245) 810,182.36 U1.5
  Bottom w5: v1(810,245) 810,217.81 876.93,150.88 986.12,150.88 H1.5
G3/Tx0: H3.8 U1.29 | length 282
  Top w5: U1.29 769.85,650.48 769.85,679.85 785,695 910,695 975,760 H3.8
G4/Rx0: H3.7 U1.28 | length 412.4
  Top w5: U1.28 824.43,628.56 824.43,590.57 840,575 v1(840,560)
  Bottom w5: v1(840,560) 979,699 1006.33,699 1069.33,762 H3.7
G5/SCLK: H1.9 U1.9 | length 523.6
  Top w5: U1.9 1011.18,163.47 1059.65,115 1422,115 H1.9
G6/Rx1/MOSI: H1.6 U1.6 | length 452
  Top w5: U1.6 870,190 870,234.48 877,241.48 v1(877,245)
  Bottom w5: v1(877,245) 879.49,242.51 879.49,229.14 947.62,161 993,161 1045,109 1128,109 H1.6
G7/Tx1/MISO: H1.7 U1.7 | length 549.7
  Top w5: v1(910,255) 910,182.36 U1.7
  Top w8: U1.7 911.18,158.82 U1.7@915,155
  Mid1-Ver w5: v1(910,255) 1048,117 1224.52,117 1275,66.52 H1.7
G8/C\S\: H1.8 U1.8 | length 587.2
  Top w5: U1.8 970,190 970,236.48 980,246.48 v1(980,250)
  Bottom w5: v1(980,250) 980,194.65 1055.65,119 1326.98,119 1375,70.98 H1.8
G9/S\P\I\_\E\N\: H1.10 U1.10 | length 587.4
  Top w5: U1.10 1067.84,174.52 1067.84,133.16 1074,127 1510,127 H1.10
G10: H3.6 U1.27 | length 473.6
  Top w5: U1.27 870,632.99 870,575 v1(895,550)
  Bottom w5: v1(895,550) 1002.56,657.56 1070.56,657.56 H3.6
G11/SWDIO: H3.5 U1.26 | length 505.3
  Top w5: U1.26 920.06,632.93 920.06,584.94 v1(940,565)
  Bottom w5: v1(940,565) 1016.81,641.81 1154.81,641.81 H3.5
G12/SWO: H3.4 U1.25 | length 586.3
  Top w5: U1.25 972,630.99 v1(972,552)
  Bottom w5: v1(972,552) 972,555.46 1024.88,608.35 1221.35,608.35 H3.4
G13/DRDY: H3.3 U1.24 | length 668
  Top w5: v1(1007.56,539.36) 1007.56,638.19 U1.24
  Bottom w5: v1(1007.56,539.36) 1010.05,541.85 1010.05,549.38 1055.67,595 1227.72,595 1351.79,719.07 1432.07,719.07 H3.3
G16/QDEC0.A: H4.1 U1.38 | length 373.6
  Top w5: U1.38 598.34,514.4 598.34,552.05 615.29,569 v1(655,569)
  Mid1-Ver w5: H4.1 510.57,726.43 511.63,726.43 655,583.06 v1(655,569)
G17/QDEC0.B: H4.2 U1.39 | length 496.8
  Top w5: U1.39 608.68,474.74 630.87,474.74 v1(645.04,488.91)
  Mid1-Ver w5: H4.2 420.57,716.43 507.49,716.43 636,587.92 636,564.67 645.04,555.63 v1(645.04,488.91)
G18/QDEC1.A: H4.4 U1.41 | length 811.3
  Top w5: U1.41 603.86,369.92 645.62,369.92 660.69,385 v1(675,385)
  Mid1-Ver w5: H4.4 252.5,684.5 487.98,684.5 579.69,592.79 579.69,480.32 v1(675,385)
G19/QDEC1.B: H4.5 U1.42 | length 944.9
  Top w5: U1.42 637.5,311.5 v1(675,349)
  Mid1-Ver w5: H4.5 125,712 197.14,712 235.14,674 484.34,674 569.69,588.65 569.69,476.17 658.5,387.36 658.5,365.5 v1(675,349)
G20/LNA-EN: H2.4 U1.20 | length 1228.6
  Top w5: v1(975,455) 990.66,455 1047.66,512 1117.72,512 1197.93,592.21 1197.93,628.56 U1.20
  Bottom w5: H2.4 437.5,124.5 533.61,124.5 534.11,125 630.21,125 710,204.79 710,275 730,295 940,295 995,350 995,435 v1(975,455)
GND: C1.2 C2.2 C15.2 C17.2 C18.2 D1.2 D2.2 D4.A H1.11 H2.1 H2.2 H2.3 H3.10 J1.2 J1.3 J2.2 J2.3 J3.A1_B12 J3.B1_A12 J3.S1 J3.S2 J3.S3 J3.S4 R5.1 R6.1 R21.1 U1.0 U1.11 U1.13 U1.15 U1.31 U2.3 U2.4 U5.2 | length 195.1
  Top w12: U5.2@400.95,397.25 U5.2@401.18,397.02
  Top w14.88: v1(1110,275) 1110,274.16 1111.18,272.98 U1.11
  Top w16: U1.15 1311.18,268.64 1320,277.46 v1(1320,278)
  other v1: 564,61 384,155 1400,155 1433,173 1470,175 1495.16,186.85 1527.76,186.85 1560.35,186.85 1592.95,186.85 1625.55,186.85 1658.15,186.85 1454.61,195.39 1482.08,210.05 1676.26,210.05 1237,227 1291,228 1136,229 1184,230 1317,230 1345,230 1375,230 1400,230 1431,234 545,235 1482.08,238.79 1676.26,238.79 736.5,251.82 1237,253 938.21,253.7 1136,254 840.85,256.71 1185,257 1039.56,267.21 1482,267 1676.26,267.53 1202,277 1230,278 1260,278 1290,278 1350,278 1380,278 398,279 1139,280 1405,280 545,285 1425,295 1483,295 1676.26,296.27 1153,303 399,312 1541.22,312.05 1618.07,312.44 1649.09,311.63 1178.25,316.8 1210,322 1240,322 1270,322 1300,322 1329,322 1425,323 429,331.04 545,335 1541.69,338.03 1473,343 1599.96,346.3 646.07,346.7 740,347 839.1,346.7 935.61,346.7 1032.13,346.7 1329,350 1425,353 1240,356 1291,357 1615.71,369.92 1329,380 545,385 1428,385 1552.72,388.03 1480,389 1526,393 1453,394 76,403 724,404 1618.86,404.17 1329,410 1430,415 1578.52,420.59 1617.68,428.19 1240,435 1295,435 739,436 839.16,436.43 935.67,436.43 1032.18,436.43 1452,436 1526,436.61 1480,439 545,440 1329,440 1430,440 1552.32,439.61 1622.8,460.47 354.25,462 1329,470 1599.96,482.91 1436,490 1464,490 1541.3,491.58 1329,500 408.96,507.25 354.25,510.62 520,515 545,515 1425,515 1616.89,518.35 1543.64,518.53 1646.81,518.74 1464,520 935,525 1165,525 1245,525 1295,525 742.7,526.17 839.16,526.17 1482.08,533.7 1676.26,533.7 408.96,535.25 1333,537 1360,543 1390,543 1420,543 520,550 545,550 1482.08,562.44 1676.26,562.44 715,575 535,580 1482.08,591.18 1676.26,591.18 1483,620 1676.26,619.92 372,631 1495.16,643.12 1527.76,643.12 1560.35,643.12 1592.95,643.12 1625.55,643.12 1658.15,643.12 1451.14,670.37 1716.14,687.37
GNSS1_ANT: D1.1 I1.2 J1.1 U1.12 | length 690.3
  Top w14.88: v1(1161,203) 1161,181.36 U1.12 ; v1(1448,465) 1448.11,464.89 1514.1,464.89 1514.18,464.98 1533.28,464.98 ccw(c1533.28,512.22) 1580.52,512.22 J1.1@1580.52,520.88
  Mid1-Ver w9.45: v1(1161,203) 1161.09,203.09 1161.09,227.09 ; 1161,227 1161.09,227.09 ; 1380.44,428.86 1380.44,336.34 cw(c1344.75,335.89) 1344.45,300.2 1344.08,300.2 1203.13,300.2 ccw(c1202.49,258.72) 1161,259 1161,236 1161.09,235.91 1161.09,227.09 ; 1381.01,428.86 cw(c1416.7,429.31) 1417,465 v1(1448,465)
GNSS1_PPS: H3.9 U1.30 | length 226.1
  Top w5: U1.30 724.43,655.06 724.43,676.43 755,707 820,707 H3.9
GNSS2_ANT: D2.1 I4.2 J2.1 U1.14 | length 484.2
  Top w14.88: v1(1448,366) 1514.37,366 I4.2 1533.28,364.98 cw(c1533.28,317.73) 1580.52,317.73 J2.1@1580.52,309.09
  Mid1-Ver w9.45: v1(1261,203) 1261,217.84 cw(c1301.46,214.29) 1300.84,254.9 1400.58,254.9 1407.3,255 ccw(c1406.65,296.48) 1448.11,298 1448.11,365.9 v1(1448,366)
GNSS2_PPS: H2.5 U1.21 | length 1099.5
  Top w5: v1(1005,495) 1032,522 1110.34,522 1161.18,572.85 U1.21
  Bottom w5: H2.5 512.12,99.12 529.86,99.12 545.75,115 641.64,115 720,193.36 720,270 735,285 945,285 1005,345 v1(1005,495)
NetC22_1: C22.1 U5.1 | length 52.6
  Top w16: C22.1 408.35,436.21 412.16,432.4 U5.1@415.63,432.4
NetJ3_A5: J3.A5 R6.2 | length 312.8
  Top w6: R6.2 122.68,657.98 v1(124.22,657.98) ; v1(248.17,475.22) 251.41,475.22 262.01,464.62 284.3,464.62 J3.A5
  Mid1-Ver w6: v1(124.22,657.98) 140.22,641.97 140.61,641.97 181.01,601.58 181.01,532.36 238.15,475.22 v1(248.17,475.22)
NetJ3_B5: J3.B5 R5.2 | length 468.7
  Top w6: R5.2 72.74,659.91 76.05,659.91 v1@78.34,657.61 ; v1(250,343) 250.3,343.3 286.9,343.3 J3.B5
  Mid1-Ver w6: v1@78.34,657.49 100.02,635.82 126.29,635.82 169.43,592.68 169.43,525.57 249.41,445.59 249.41,343.89 v1@250.15,343.15
  Bottom w6: v1@78.34,657.49 v1@78.34,657.61
  other v1: 78.34,657.98
nRESET: H3.1 R2.2 U1.22 | length 893
  Top w5: v1(1074.91,557.04) 1111.18,593.31 U1.22
  Top w6: R2.2 1647.95,716.3 1647.95,734.95 H3.1
  Bottom w5: v1(1074.91,557.04) 1076.37,557.04 1084.34,565 1226,565 1356,695 1495,695 1515,715 1628,715 H3.1
SW: C22.2 D4.C I5.1 U5.6
SWCLK: H3.2 U1.23 | length 712.1
  Top w5: v1(1041,557) 1043.49,559.49 1043.49,571.56 1047.93,576 1047.93,628.56 U1.23
  Bottom w5: v1(1041,557) 1065.5,581.5 1228.36,581.5 1351.86,705 1489.71,705 1535.8,751.09 1564.09,751.09 H3.2
USB.D_N: H1.2 J3.A7 J3.B7 U1.2 U2.2 | length 1514.5
  Top w8: U1.2 656.87,176.87 656.87,140.4 664.08,133.2 711.94,133.2 726.67,118.47 726.67,97.33 762,62 H1.2
  Top w10.7: U2.2 194.18,655 179.38,640.2 179.38,478.49 212.97,444.9 218.76,444.9 v1(220.16,443.5) ; v1@219.71,442.91 220.59,442.03 303.94,442.03 304.49,441.47 311.26,441.47 320.19,432.54 320.19,412.15 311.26,403.21 287.76,403.21 J3.A7 ; v1(647.68,257) 646.28,255.6 646.28,247 644.03,244.74 644.03,233.29 644.03,215.56 650.3,209.3 650.78,209.3 661.18,198.9 U1.2
  Bottom w10.7: v1(220.16,443.5) 218.76,442.11 213.6,442.11 213.11,441.61 186.78,441.61 168.21,423.04 157.25,412.09 157.25,222.94 192.94,187.25 605.88,187.25 645.53,226.91 645.53,246.24 646.28,247 646.28,255.6 v1(647.68,257)
USB.D_P: H1.1 J3.A6 J3.B6 U1.1 U2.1 | length 1456.9
  Top w8: U1.1 611.18,163.47 657.45,117.2 705.31,117.2 710,112.51 710,97 H1.1
  Top w10.7: U2.1 202.48,674.26 195.66,674.26 195.11,673.7 186.44,673.7 160.68,647.95 160.68,470.74 205.22,426.2 208.41,426.2 215.35,419.26 219.3,419.26 223.36,423.33 253.67,423.33 ; J3.B6 286.65,383.53 263.15,383.53 253,393.68 253,422.66 253.67,423.33 ; J3.A6 286.65,422.9 265.67,422.9 265.24,423.33 253.67,423.33 ; U1.1 611.18,198.9 621.58,209.3 622.06,209.3 628.33,215.56 628.33,226.78 628.33,244.74 626.08,247 626.08,255.6 v1(624.68,257)
  Bottom w10.7: v1(217.32,419.26) 215.35,419.26 211.7,422.91 194.52,422.91 175.95,404.34 175.95,230.68 200.68,205.95 598.13,205.95 626.83,234.65 626.83,246.24 626.08,247 626.08,255.6 v1(624.68,257)
VANT: I1.1 I4.1 U1.16 | length 477.8
  Top w10: I4.1@1514.05,321.32 I4.1
  Top w15: U1.16 1410,181.18 1457,228.18 1457,299.41 1478.21,320.61 1488.41,320.61 1489.22,321.42 1513.96,321.42 I4.1@1514.05,321.32 ; v1@1488.94,508.11 I1.1
  Mid1-Ver w15: v1(1488.12,508.11) 1503.56,492.67 1503.56,336.57 1488.99,322 v1(1488.99,321.19)
VAUX: H4.3 R3.2 U1.40 | length 790.4
  Top w16: H4.3 285.33,751.67 285.33,732.64 311.09,706.88 R3.2@311.09,656.19 ; U1.40 603.18,419.24 638.83,419.24 669.3,449.72 669.3,518.81 639.4,548.71 626.35,548.71 v1(625.97,549.1)
  Mid1-Ver w16: H4.3 337,700 502,700 617.17,584.83 617.17,558.43 625.97,549.64 v1(625.97,549.1)
VBAT: H1.3 R1.2 U1.3 | length 952.4
  Top w16: R1.2@205.77,174.42 253.94,126.25 532.25,126.25 v1(548,142) ; U1.3 711.18,163.47 757.65,117 820,117 H1.3
  Mid1-Ver w16: v1(548,142) 795,142 H1.3
VBUS_IMX: C2.1 D3.A J3.A4_B9 J3.B4_A9 U2.5 | length 555.4
  Top w16: U2.5 272.48,655 283.58,643.9 283.58,636.6 346.03,574.16 346.19,574.16 C2.1 349.07,569.41 349.07,536.54 321.9,509.38 289.59,509.38 J3.A4_B9 ; J3.B4_A9 315.59,318.01 325.72,318.01 329.89,313.85 ; 324.19,507.09 324.19,454.49 338.54,440.14 338.54,354.54 329.89,345.89 329.89,313.85 ; D3.A@346.66,250.23 329.89,267 329.89,313.85
VIN: C15.1 D3.C I3.1